# Altium PCB UWB_Control.PcbDoc
Units mil, origin at the board's own origin, x right, y up, seen from the top; angles counter-clockwise.
Board outline 1600 x 2735 mil, 2 copper layers (Top Layer, Bottom Layer); 21 components, 31 nets, 179 pads, 39 vias.
Unrouted connection lines stored in the file: 1.
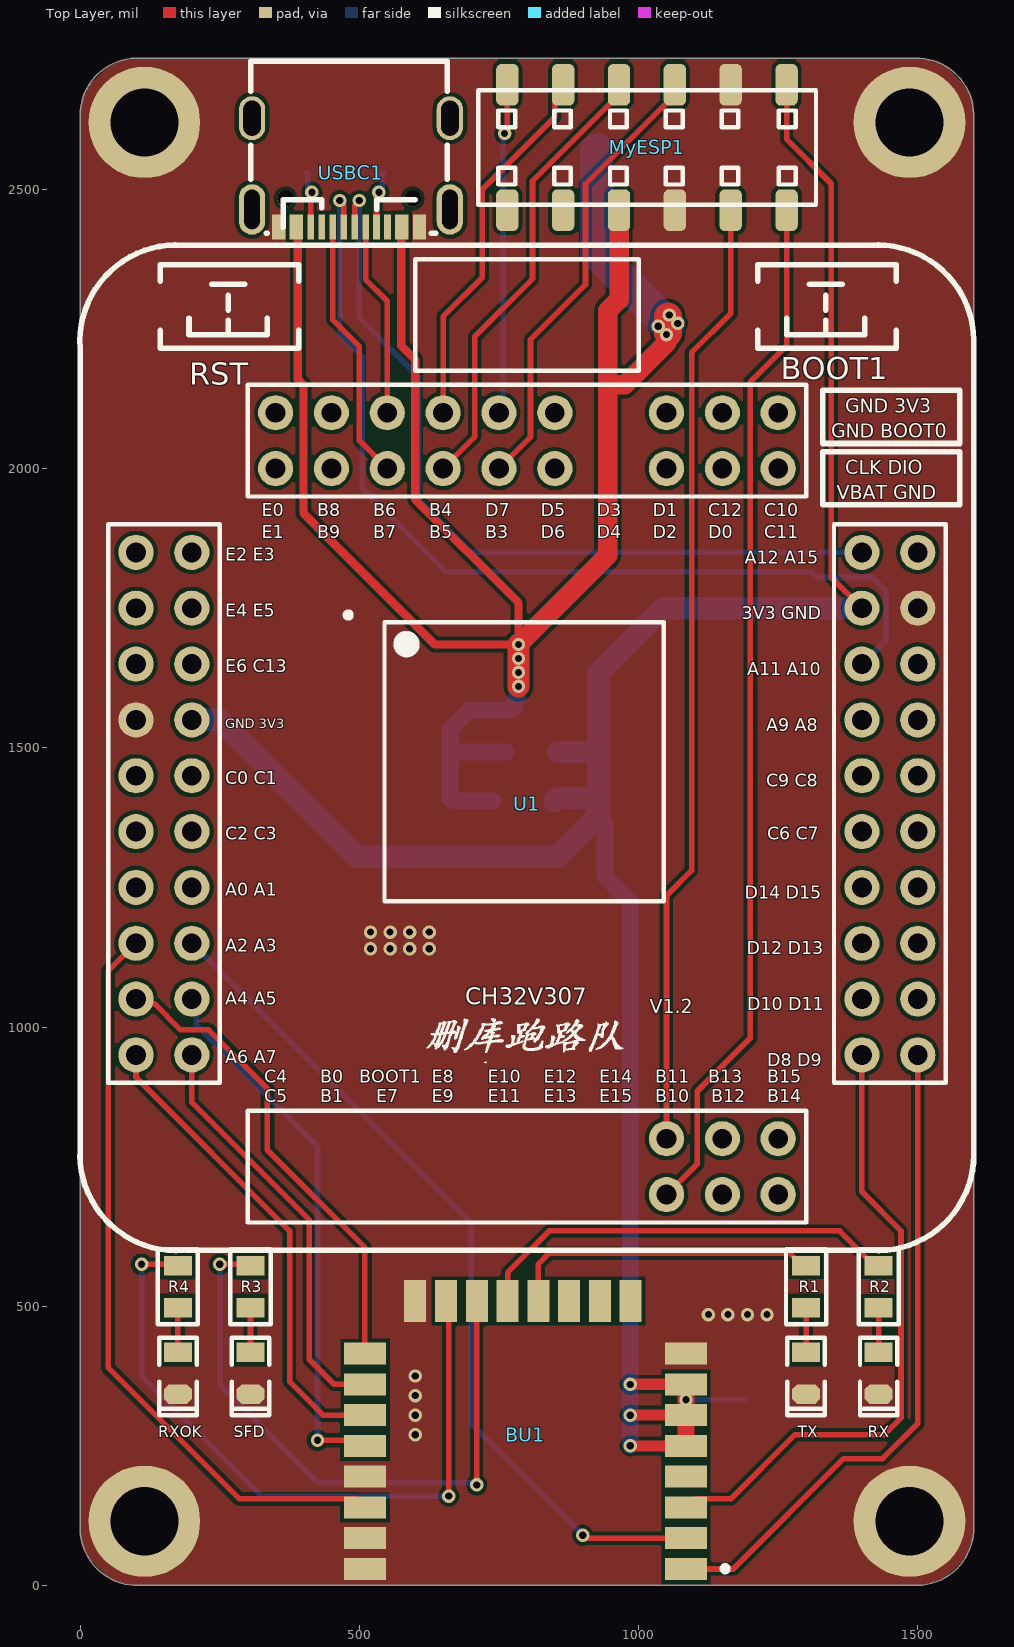
[diagram p0: Top Layer view]
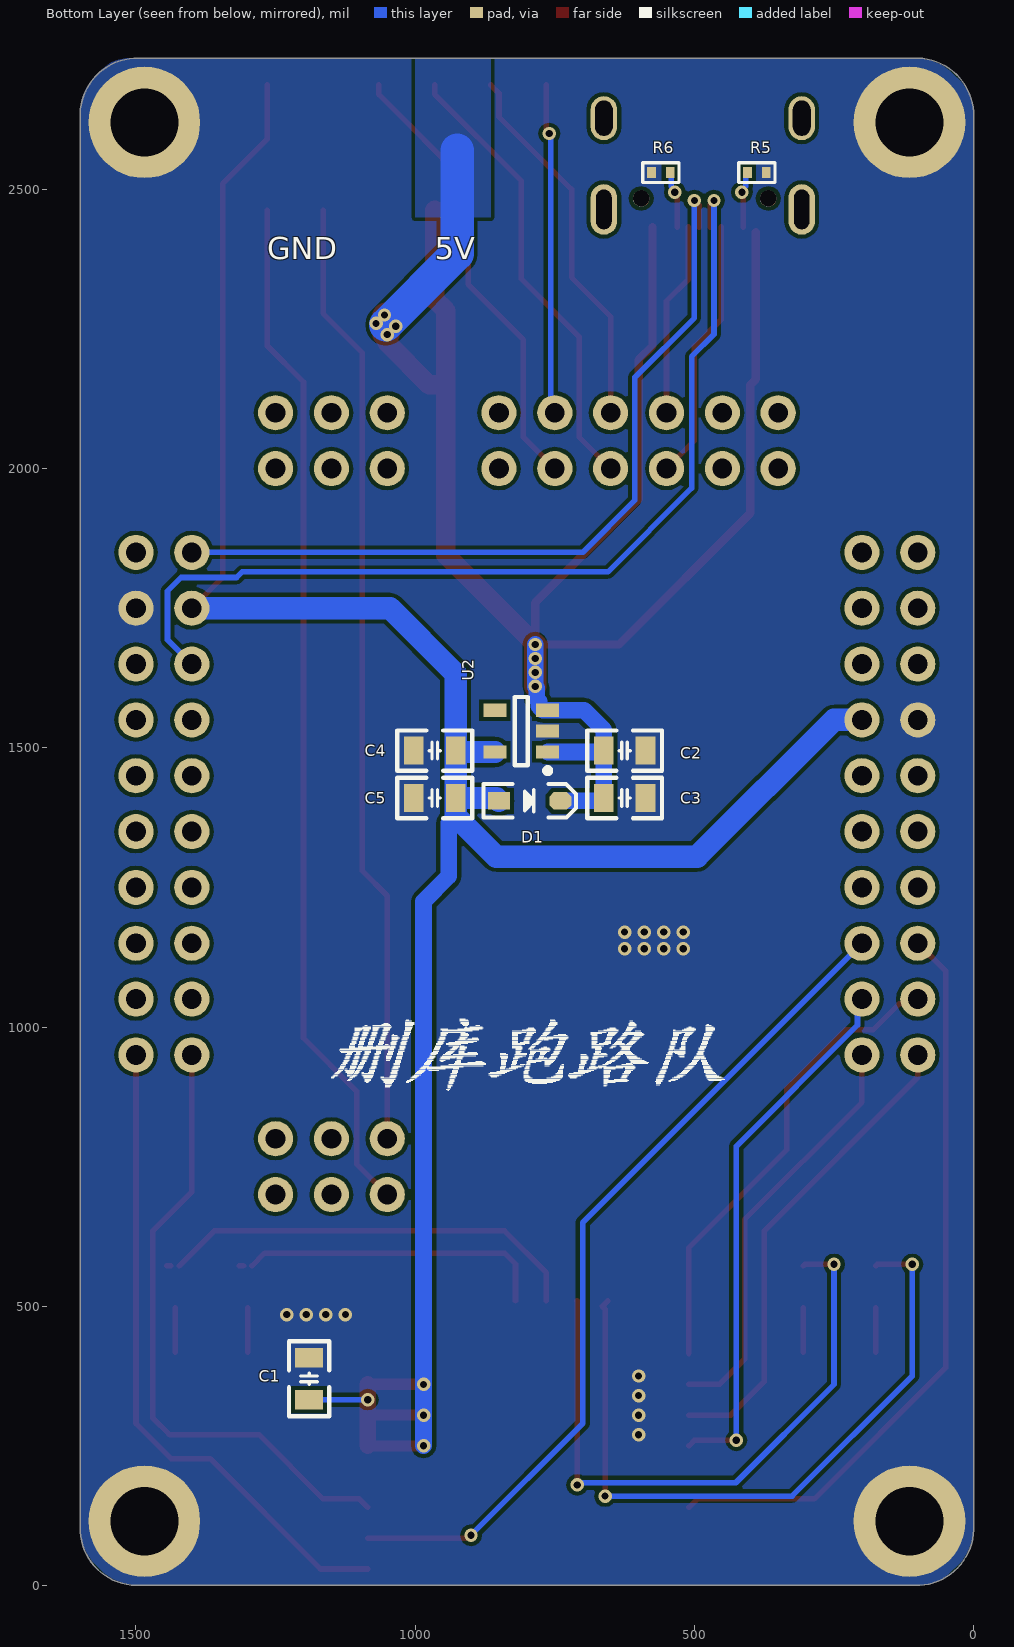
[diagram p1: Bottom Layer view, seen from below]

## Layer stack, top to bottom
Top Solder: solder mask 0.4, Solder Resist, Dk 3.5
Top Layer: signal copper 1.4
Dielectric 1: dielectric 12.6, FR-4, Dk 4.8
Bottom Layer: signal copper 1.4
Bottom Solder: solder mask 0.4, Solder Resist, Dk 3.5

## Board outline
0,100 0,2630 cw(c102.5,2632.5) 100,2735 1495,2735 cw(c1497.5,2632.5) 1600,2635 1600,105 cw(c1497.5,102.5) 1500,0 105,0 cw(c102.5,102.5)

## Design rules (kind name [scope] priority, off if disabled: settings)
Clearance [All] p1: gap=7 ignorepadtopadclearanceinfootprint=FALSE
PolygonConnect PolygonConnect_4 [All vs IsNamedPolygon('Bottom Layer-GND') Or  IsNamedPolygon('Top Layer-GND')] p1: connectstyle=Direct reliefconductorwidth=10 reliefentries=4 polygonreliefangle="90 Angle" airgapwidth=10
PolygonConnect PolygonConnect_3 [All vs IsNamedPolygon('Bottom Layer-5V')] p2: connectstyle=Direct reliefconductorwidth=10 reliefentries=4 polygonreliefangle="90 Angle" airgapwidth=10
PolygonConnect PolygonConnect_2 [All vs IsNamedPolygon('Top Layer-GND')] p3: connectstyle=Direct reliefconductorwidth=10 reliefentries=4 polygonreliefangle="90 Angle" airgapwidth=10
PolygonConnect PolygonConnect_1 [All vs IsNamedPolygon('Bottom Layer-GND') Or  IsNamedPolygon('Top Layer-GND')] p4: connectstyle=Direct reliefconductorwidth=10 reliefentries=4 polygonreliefangle="90 Angle" airgapwidth=10
PolygonConnect [All] p5: connectstyle=Relief reliefconductorwidth=10 reliefentries=4 polygonreliefangle="90 Angle" airgapwidth=10
RoutingVias [All] p1: holewidth=28 width=50 viastyle="Through Hole" minholewidth=28 minwidth=50 maxholewidth=28 maxwidth=50
SolderMaskExpansion [All] p1: expansion=4
Width [All] p1: maxlimit=100 minlimit=10 preferedwidth=10
30 further rules are at their usual default settings.

## Components (designator, comment, footprint, x,y, rotation, side; value= is the part's Value field where it differs from the comment)
BU1 "BU01" "BU01 - duplicate" 915,169.53 r180 top
C1 "0.1uF" C0805_L 1190,370 r270 bottom
C2 "10uF" C0805_L 625,1495 r180 bottom
C3 "100nF" C0805_L 625,1410 r180 bottom
C4 "4.7uF" C0805_L 965,1495 r180 bottom
C5 "100nF" C0805_L 965,1410 r180 bottom
D1 "1N5819" SOD-323 795,1405 r180 bottom
MyESP1 "Header 6X2" HDR2.54-M-LS-2x6P 1015,2575 r180 top
R1 "1K" R0805_L 1300,535 r270 top
R2 "1K" R0805_L 1430,535 r270 top
R3 "1K" R0805_L 305,535 r270 top
R4 "1K" R0805_L 175,535 r270 top
R5 "5.1K" R0402_L 388.27,2530 r180 bottom
R6 "5.1K" R0402_L 560,2530 r180 bottom
RX "红色" LED0805_G 1430,380 r270 top (schematic designator LED2)
RXOK "红色" LED0805_G 175,380 r270 top (schematic designator LED4)
SFD "红色" LED0805_G 305,380 r270 top (schematic designator LED3)
TX "红色" LED0805_G 1300,380 r270 top (schematic designator LED1)
U1 "CH32V307_CoreBoard" CH32V307_PCB 265,2145 r0 top
U2 "" SOT23-5 810,1530 r0 bottom
USBC1 "TYPE-C 2.0 -16P" USB-C-SMD_TYPE-C-USB-5 485,2530 r180 top

## Footprints (in the part's own frame and the unit in brackets; to place one, negate y for a bottom-side part, rotate by r counter-clockwise, add the part's x,y. Pads: shape width x height; smd on the part's side, far side on the other; paste and mask are expansions set on the pad)
"BU01 - duplicate" [mm] "Chip Capacitor, 2-Leads, Body 5.50x2.00mm, IPC Medium Density"
  rect 1.9x1 smd: 1(-4.318,3.556) 2(-4.318,2.156) 3(-4.318,0.756) 4(-4.318,-0.644) 5(-4.318,-2.044) 6(-4.318,-3.444) 7(-4.318,-4.844) 8(-4.318,-6.244) 17(10.287,-6.244) 18(10.287,-4.844) 19(10.287,-3.444) 20(10.287,-2.044) 21(10.287,-0.644) 22(10.287,0.756) 23(10.287,2.156) 24(10.287,3.556)
  rect 1x1.9 smd: 9(-1.799,-8.636) 10(-0.399,-8.636) 11(1.001,-8.636) 12(2.401,-8.636) 13(3.801,-8.636) 14(5.201,-8.636) 15(6.601,-8.636) 16(8.001,-8.636)
C0805_L [mil] "贴片MLCC电容"
  rect 35x50 smd: 1(-37.4,0) 2(37.4,0)
  silkscreen extent -67,-36 67,36, body extent -39,-24 39,24, height 22
CH32V307_PCB [mm]
  round 1.6 hole 0.9: 1(-1.651,-7.493) 2(-4.191,-7.493) 3(-1.651,-10.033) 4(-4.191,-10.033) 5(-1.651,-12.573) 6(-4.191,-12.573) 7(-1.651,-15.113) 8(-4.191,-15.113) 9(-1.651,-17.653) 10(-4.191,-17.653) 11(-1.651,-20.193) 12(-4.191,-20.193) 13(-1.651,-22.733) 14(-4.191,-22.733) 15(-1.651,-25.273) 16(-4.191,-25.273) 17(-1.651,-27.813) 18(-4.191,-27.813) 19(-1.651,-30.353) 20(-4.191,-30.353) 35(19.939,-34.163) 36(19.939,-36.703) 37(22.479,-34.163) 38(22.479,-36.703) 39(25.019,-34.163) 40(25.019,-36.703) 41(28.829,-30.353) 42(31.369,-30.353) 43(28.829,-27.813) 44(31.369,-27.813) 45(28.829,-25.273) 46(31.369,-25.273) 47(28.829,-22.733) 48(31.369,-22.733) 49(28.829,-20.193) 50(31.369,-20.193) 51(28.829,-17.653) 52(31.369,-17.653) 53(28.829,-15.113) 54(31.369,-15.113) 55(28.829,-12.573) 56(31.369,-12.573) 57(28.829,-10.033) 58(31.369,-10.033) 59(28.829,-7.493) 60(31.369,-7.493) 61(25.019,-3.683) 62(25.019,-1.143) 63(22.479,-3.683) 64(22.479,-1.143) 65(19.939,-3.683) 66(19.939,-1.143) 69(14.859,-3.683) 70(14.859,-1.143) 71(12.319,-3.683) 72(12.319,-1.143) 73(9.779,-3.683) 74(9.779,-1.143) 75(7.239,-3.683) 76(7.239,-1.143) 77(4.699,-3.683) 78(4.699,-1.143) 79(2.159,-3.683) 80(2.159,-1.143)
  round 1.6 on Top Overlay: 21(2.159,-34.163) 22(2.159,-36.703) 23(4.699,-34.163) 24(4.699,-36.703) 25(7.239,-34.163) 26(7.239,-36.703) 27(9.779,-34.163) 28(9.779,-36.703) 29(12.319,-34.163) 30(12.319,-36.703) 31(14.859,-34.163) 32(14.859,-36.703) 33(17.399,-34.163) 34(17.399,-36.703) 67(17.399,-3.683) 68(17.399,-1.143)
  silkscreen extent -6.74,-39.25 33.92,6.49
HDR2.54-M-LS-2x6P [mm] "脚距：2.54mm，贴片双排母"
  rrect50% 1.02x1.9 smd: 1(-6.35,2.85) 2(-6.35,-2.85) 3(-3.81,2.85) 4(-3.81,-2.85) 5(-1.27,2.85) 6(-1.27,-2.85) 7(1.27,2.85) 8(1.27,-2.85) 9(3.81,2.85) 10(3.81,-2.85) 11(6.35,2.85) 12(6.35,-2.85)
  silkscreen extent -7.69,-2.6 7.68,2.6, body extent -7.65,-3.2 7.65,3.2, height 5.15
LED0805_G [mil] "绿色0805LED            联系卖家 免费查找封装"
  rect 35x50 smd: 1(-37.4,0)
  oct 35x50 smd: 2(37.4,0)
  silkscreen extent -64,-33 75,33, body extent -39,-25 39,25, height 32
R0402_L [mm] "1/16W贴片电阻"
  rect 0.4x0.5 smd: 1(-0.425,0) 2(0.425,0)
  silkscreen extent -0.82,-0.45 0.83,0.45, body extent -0.5,-0.25 0.5,0.25, height 0.3
R0805_L [mil] "1/8W贴片电阻"
  rect 35x50 smd: 1(-37.4,0) 2(37.4,0)
  silkscreen extent -67,-36 67,36, body extent -39,-25 39,25, height 20
SOD-323 [mm] "1.8x1.3X0.9mm（长宽高，不包括引脚）联系卖家 免费查找封装"
  rect 1x0.8 smd: 1(-1.4,0)
  oct 1x0.8 smd: 2(1.4,0)
  silkscreen extent -2.11,-0.76 2.11,0.76, body extent -1.32,-0.65 1.32,0.65, height 0.95
SOT23-5 [mm] "SOT23, 5-Leads, Body 2.9x1.6mm, Pitch 0.95mm, IPC Medium Density                联系卖家 免费查找封装"
  rect 1.05x0.6 smd: 1(-1.2,0.95) 2(-1.2,0) 3(-1.2,-0.95) 4(1.2,-0.95) 5(1.2,0.95)
  silkscreen extent -1.32,-1.55 0.3,1.92, body extent -1.4,-1.5 1.4,1.5, height 1.15
USB-C-SMD_TYPE-C-USB-5 [mm]
  oval 1.2x2 hole 0.8 slot 1.6 at 90 deg: 0(-4.5,-2.475) 0(4.5,-2.475)
  oval 1.2x2.3 hole 0.7 slot 1.8 at 90 deg: 0(-4.5,1.675) 0(4.5,1.675)
  rect 0.3x1.15 smd: A1(-3.263,2.473) A4(-2.462,2.471) A5(-1.162,2.475) A6(-0.162,2.475) A7(0.337,2.473) A9(2.638,2.475) A12(3.438,2.475) B1(3.138,2.475) B4(2.337,2.475) B5(1.838,2.475) B6(0.838,2.475) B7(-0.663,2.473) B9(-2.162,2.471) B12(-2.963,2.473)
  rect 0.3x1.148 smd: A8(-1.663,2.475) B8(1.337,2.475)
  round 0.75 hole 0.75 unplated: ""(-2.803,1.175) ""(2.978,1.175)
  silkscreen extent -4.38,-5.08 4.56,2.75, body extent -4.34,-5.14 4.6,2.76, height 3.25

## Part data
C1 C2 C3 C4 C5: library part C, "贴片电容/MLCC电容"
D1: library part SS14, "肖特基二极管"
MyESP1: library part "Header  6X2", "6*2P接插件"
R1 R2 R3 R4 R5 R6: library part R, "贴片电阻"
RX RXOK SFD TX: library part LED-SMD, "贴片LED"
U2: library part RT9013-33
USBC1: library part "USB2.0 Type-C 16Pin母座", "USB2.0 Type-C 母座 16Pin", BOM_Manufacturer=LCSC, BOM_Manufacturer Part=-, BOM_Supplier=LCSC, spicePre=U, spiceSymbolName="TYPE-C 3.1 -16P_C168689"

## Free pads (board coordinates)
  round 200 hole 122.05: ""(115,115) ""(115,2620) ""(1485,115) ""(1485,2620)

## Via types
v1: diameter 24, hole 13, Top Layer to Bottom Layer, tented both sides, 39 vias

## Nets (pads, with @x,y where several pads share a name; then routed paths per layer and width w, separated by ;. In a path a pad name is that pad's centre, name@x,y a point inside that pad or via, vN(x,y) a via of type N, cw(c..) or ccw(c..) an arc to the next point about the centre after c; other vN are vias at no path point)
3V3: BU1.5 BU1.6 BU1.7 C1.2 C4.2 C5.2 D1.1 MyESP1.2 U1.7 U1.57 U2.5 | length 4446
  Top Layer w10: v1(985,305) v1@985.12,305.12 ; v1(985,360) v1@985.24,360.24 ; MyESP1.2 1265,2590 1345,2510 1345,1805 U1.57
  Top Layer w20: v1(985,250) BU1.5 ; v1@985.12,305.12 BU1.6 ; v1@985.24,360.24 BU1.7
  Top Layer w30: BU1.5 BU1.6 v1(1085,332.68) BU1.7
  Bottom Layer w10: v1(1085,332.68) 1189.93,332.68 C1.2
  Bottom Layer w30: 927.6,1377.6 940,1365.2 940,1270 985,1225 v1(985,360) v1(985,305) v1(985,250)
  Bottom Layer w40: U1.7 250,1550 495,1305 855,1305 927.6,1377.6 C5.2 ; D1.1 855.11,1410 C5.2 ; U2.5 925.2,1492.6 C4.2 ; U1.57 1045,1750 927.6,1632.6 C4.2 ; C5.2 C4.2
5V: C2.1 C3.1 D1.2 MyESP1.7 U2.1 U2.3 USBC1.A4 USBC1.A9 USBC1.B4 USBC1.B9 | length 3855.8
  Top Layer w10: v1(1050,2240) v1@1052.5,2242.5 ; v1@1052.5,2272.5 v1(1055,2275)
  Top Layer w15: USBC1.B4@390,2423.72 390,2160 400,2150 400,1920 635,1685 v1(785,1685) 785,1760 600,1945 600,2195 575.14,2219.86 USBC1.B9@575.14,2432.72
  Top Layer w35: v1(785,1685) 945,1845 945,2282.74 965,2302.74 MyESP1.7 ; 945,2150 975,2150 1050,2225 v1(1050,2240)
  Top Layer w40: v1(785,1610) v1(785,1635) v1(785,1685)
  Top Layer w50: v1@1052.5,2242.5 v1@1052.5,2272.5
  Bottom Layer w30: D1.2 667.4,1405 C3.1 C2.1 ; U2.1 664.8,1492.6 C2.1 ; v1(785,1685) v1(785,1635) v1(785,1610) 782.32,1607.32 782.32,1586.97 778.43,1583.07 778.43,1574.21 771.61,1567.4 U2.3 697.4,1567.4 662.4,1532.4 C2.1
  Bottom Layer w60: 925,2570 925,2385 1052.5,2257.5
  other v1: 785,1660 1035,2255 1070,2260
B3: MyESP1.6 U1.71 | length 817.7
  Top Layer w10: U1.71 806.5,2056.5 806.5,2231.17 905,2329.67 905,2509.88 1065,2669.88 MyESP1.6
B4: MyESP1.10 U1.74 | length 676.3
  Top Layer w10: U1.74 650,2272.17 720,2342.17 720,2500 849.92,2629.92 849.92,2672.13 MyESP1.10
B5: MyESP1.8 U1.73 | length 817.7
  Top Layer w10: U1.73 706.5,2056.5 706.5,2236.17 810,2339.67 810,2514.88 965,2669.88 MyESP1.8
B10: MyESP1.1 U1.36 | length 1851.9
  Top Layer w10: U1.36 1105,755 1105,885 1200,980 1200,2155 1265,2220 MyESP1.1
B11: MyESP1.3 U1.35 | length 1710.4
  Top Layer w10: U1.35 1050,1235 1095,1280 1095,2207.7 1165,2277.7 MyESP1.3
D7: MyESP1.12 U1.72 | length 600.5
  Top Layer w10: v1@755,2595 v1(760,2600) 765,2605 MyESP1.12
  Bottom Layer w10: U1.72 757.32,2107.32 757.32,2597.32 v1(760,2600)
EXTON: BU1.1 U1.42 | length 1182.9
  Top Layer w10: BU1.1 1169.53,29.53 1367,227 1437,227 1500,290 U1.42
GND: BU1.8 BU1.16 BU1.21 BU1.23 BU1.24 C1.1 C2.2 C3.2 C4.1 C5.1 MyESP1.4 MyESP1.5 pad. R5.2 R6.1 RX.2 RXOK.2 SFD.2 TX.2 U1.8 U1.58 U2.2 USBC1.A1 USBC1.A12 USBC1.B1 USBC1.B12
  other v1: 600,270 600,305 600,340 600,375 1125,485 1160,485 1195,485 1230,485 520,1140 555,1140 590,1140 625,1140 520,1170 555,1170 590,1170 625,1170
LED_RX: BU1.13 R2.1 | length 772.3
  Top Layer w10: BU1.13 765.35,560.35 840,635 1359.9,635 R2.1@1422.5,572.4 ; R2.1@1437.5,572.4 R2.1@1445,572.4
LED_RXOK: BU1.15 R4.1 | length 1495.8
  Top Layer w10: v1(110,575) 172.4,575 R4.1 ; BU1.15 665,499.65 660,494.65 v1(660,160) 660,395
  Bottom Layer w10: v1(110,575) 110,375 325,160 v1(660,160)
LED_SFD: BU1.14 R3.1 | length 1135.3
  Top Layer w10: v1(250,575) 302.4,575 R3.1 ; v1(710,180) 710,509.29 BU1.14
  Bottom Layer w10: v1(250,575) 250,360 426,184 706,184 v1(710,180)
LED_TX: BU1.12 R1.1 | length 562.9
  Top Layer w10: BU1.12 820.47,575.47 840,595 1269.9,595 R1.1@1292.5,572.4 ; R1.1@1307.5,572.4 R1.1@1315,572.4
NetLED1_1: R1.2 TX.1 | length 80.2
  Top Layer w10: TX.1 R1.2
NetLED2_1: R2.2 RX.1 | length 80.2
  Top Layer w10: RX.1 R2.2
NetLED3_1: R3.2 SFD.1 | length 80.2
  Top Layer w10: SFD.1 R3.2
NetLED4_1: R4.2 RXOK.1 | length 80.2
  Top Layer w10: RXOK.1 R4.2
NetR5_1: R5.1 USBC1.B5 | length 102.6
  Top Layer w10: USBC1.B5 412.66,2492.65 v1(415,2495)
  Bottom Layer w10: R5.1 407.87,2527.13 407.87,2505.91 415,2498.79 v1(415,2495)
NetR6_2: R6.2 USBC1.A5 | length 102.6
  Top Layer w10: USBC1.A5 530.76,2490.77 v1(535,2495)
  Bottom Layer w10: v1(535,2495) 535,2498.79 541.37,2505.16 541.37,2528.1 R6.2
PA11: U1.55 USBC1.A7 | length 1745.3
  Top Layer w10: v1(465,2480) 471.72,2473.28 USBC1.A7
  Bottom Layer w10: v1(465,2480) 465,2240.61 505,2200.61 505,1965 655,1815 1310,1815 1320,1805 1419.14,1805 1443.5,1780.65 1443.5,1693.5 U1.55
PA12: U1.59 USBC1.A6 | length 1463.8
  Top Layer w10: USBC1.A6 491.39,2471.4 v1(500,2480)
  Bottom Layer w10: v1(500,2480) 500,2270 606.5,2163.5 606.5,1943.5 700,1850 U1.59
PB6: U1.76 USBC1.B7 | length 348.7
  Top Layer w10: USBC1.B7 511.09,2338.91 550,2300 U1.76
PB7: U1.75 USBC1.B6 | length 473.1
  Top Layer w10: USBC1.B6 452.02,2266.9 500,2218.93 500,2050 U1.75
RSTN: BU1.3 U1.41 | length 1130.4
  Top Layer w10: BU1.3 1100.24,155 1165,155 1280,270 1440,270 1470,300 1470,635 1400,705 U1.41
SPI_CS: BU1.17 U1.18 | length 848.4
  Top Layer w10: U1.18 108.01,1041.99 133.01,1041.99 180,995 230,995 335,890 335,780 510,605 BU1.17
SPI_IRQ: BU1.22 U1.16 | length 1344.4
  Top Layer w10: U1.16 50,1100 50,390 285,155 494.76,155 BU1.22
SPI_MISO: BU1.19 U1.20 | length 858.7
  Top Layer w10: U1.20 100,910 375,635 375,365 434.88,305.12 BU1.19
SPI_MOSI: BU1.18 U1.19 | length 750.5
  Top Layer w10: U1.19 200,865 410,655 410,405 454.76,360.24 BU1.18
SPI_SCK: BU1.20 U1.17 | length 972.3
  Top Layer w10: v1(425,260) 500,260 BU1.20
  Bottom Layer w10: U1.17 208.01,1041.99 208.01,1003.5 425,786.51 v1(425,260)
WAKEUP: BU1.2 U1.15 | length 1537.2
  Top Layer w10: v1(900,90) 903.79,90 909.14,84.65 BU1.2
  Bottom Layer w10: U1.15 700,650 700,290 v1(900,90)
pads on no net: BU1.4 BU1.9 BU1.10 BU1.11 MyESP1.9 MyESP1.11 U1.1 U1.2 U1.3 U1.4 U1.5 U1.6 U1.9 U1.10 U1.11 U1.12 U1.13 U1.14 U1.21 U1.22 U1.23 U1.24 U1.25 U1.26 U1.27 U1.28 U1.29 U1.30 U1.31 U1.32 U1.33 U1.34 U1.37 U1.38 U1.39 U1.40 U1.43 U1.44 U1.45 U1.46 U1.47 U1.48 U1.49 U1.50 U1.51 U1.52 U1.53 U1.54 U1.56 U1.60 U1.61 U1.62 U1.63 U1.64 U1.65 U1.66 U1.67 U1.68 U1.69 U1.70 U1.77 U1.78 U1.79 U1.80 U2.4 USBC1. USBC1.0 USBC1.A8 USBC1.B8

## Polygon pours and split planes (outlines as drawn)
GND on Bottom Layer "Bottom Layer-GND" (solid, pour order 18): 0,106.42 ccw(c100,106.42) 29.29,35.71 40,25 ccw(c100.36,85.36) 100.36,0 1493.58,0 ccw(c1493.58,100) 1564.29,29.29 1570.71,35.71 ccw(c1500,106.42) 1600,106.42 1600,2633.58 ccw(c1500,2633.58) 1570.71,2704.29 1560,2715 ccw(c1511.72,2666.72) 1511.72,2735 106.42,2735 ccw(c106.42,2635) 35.71,2705.71 25,2695 ccw(c85.36,2634.64) 0,2634.64
5V on Bottom Layer "Bottom Layer-5V" (solid, pour order 14): 865,2735 865,2450 1000,2450 1000,2735
GND on Top Layer "Top Layer-GND" (solid, pour order 16): 0,2635 0,100 ccw(c84.5,100) 24.75,40.25 40,25 ccw(c100.36,85.36) 100.36,0 1493.58,0 ccw(c1493.58,100) 1564.29,29.29 1570.71,35.71 ccw(c1500,106.42) 1600,106.42 1600,2628.58 ccw(c1500,2628.58) 1570.71,2699.29 1555,2715 ccw(c1506.72,2666.72) 1506.72,2735 106.42,2735 ccw(c106.42,2635) 35.71,2705.71 24.75,2694.75 ccw(c84.5,2635)

## Silkscreen, mask and mechanical layers (free items; w line width, h text height)
Top Overlay:
  circle w10: c1155,30 r5
Bottom Overlay:
  drawing of 894 lines, arcs and shapes, not listed
  text "5V" at 965,2375 h40
  text "GND" at 1265,2375 h40
Bottom Solder:
  rectangle: 1145,2450 1280,2735
  rectangle: 865,2450 1000,2735
Mechanical 1:
  the board outline again, w10

## Text inside footprints (layer, text, board x,y; h text height)
U1: Top Overlay "CLK DIO" at 1370,1990 h25; Top Overlay "VBAT GND" at 1355,1945 h25; Top Overlay "GND BOOT0" at 1345,2055 h25; Top Overlay "GND 3V3" at 1370,2100 h25; Top Overlay "BOOT1" at 1255,2160 h40; Top Overlay "RST" at 195,2150 h40; Top Overlay "A4 A5" at 260,1040 h23; Top Overlay "A12 A15" at 1190,1830 h23; Top Overlay "V1.2" at 1020,1025 h25; Top Overlay "C4" at 330,900 h23; Top Overlay "B0" at 430,900 h23; Top Overlay "BOOT1" at 500,900 h23; Top Overlay "E8" at 630,900 h23; Top Overlay "E10" at 730,900 h23; Top Overlay "E12" at 830,900 h23; Top Overlay "E14" at 930,900 h23; Top Overlay "B11" at 1030,900 h23; Top Overlay "B13" at 1125,900 h23; Top Overlay "B15" at 1230,900 h23; Top Overlay "C5" at 330,865 h23; Top Overlay "B1" at 430,865 h23; Top Overlay "E7" at 530,865 h23; Top Overlay "E9" at 630,865 h23; Top Overlay "E11" at 730,865 h23; Top Overlay "E13" at 830,865 h23; Top Overlay "E15" at 930,865 h23; Top Overlay "B10" at 1030,865 h23; Top Overlay "B12" at 1130,865 h23; Top Overlay "B14" at 1230,865 h23; Top Overlay "E1" at 325,1875 h23; Top Overlay "B9" at 425,1875 h23; Top Overlay "B7" at 525,1875 h23; Top Overlay "B5" at 625,1875 h23; Top Overlay "B3" at 725,1875 h23; Top Overlay "D6" at 825,1875 h23; Top Overlay "D4" at 925,1875 h23; Top Overlay "D2" at 1025,1875 h23; Top Overlay "D0" at 1125,1875 h23; Top Overlay "C11" at 1225,1875 h23; Top Overlay "C10" at 1225,1915 h23; Top Overlay "C12" at 1125,1915 h23; Top Overlay "D1" at 1025,1915 h23; Top Overlay "D3" at 925,1915 h23; Top Overlay "D5" at 825,1915 h23; Top Overlay "D7" at 725,1915 h23; Top Overlay "B4" at 625,1915 h23; Top Overlay "B6" at 525,1915 h23; Top Overlay "B8" at 425,1915 h23; Top Overlay "E0" at 325,1915 h23; Top Overlay "3V3 GND" at 1185,1730 h23; Top Overlay "A11 A10" at 1195,1630 h23; Top Overlay "A9 A8" at 1228.32,1530 h23; Top Overlay "C9 C8" at 1228.32,1430 h23; Top Overlay "C6 C7" at 1230,1335 h23; Top Overlay "D14 D15" at 1190,1230 h23; Top Overlay "D12 D13" at 1193.83,1130 h23; Top Overlay "D10 D11" at 1195,1030 h23; Top Overlay "D8 D9" at 1230,930 h23; Top Overlay "A6 A7" at 260,935 h23; Top Overlay "A2 A3" at 260,1135 h23; Top Overlay "A0 A1" at 260,1235 h23; Top Overlay "C2 C3" at 260,1335 h23; Top Overlay "C0 C1" at 260,1435 h23; Top Overlay "GND 3V3" at 260,1535 h17; Top Overlay "E6 C13" at 260,1635 h23; Top Overlay "E4 E5" at 260,1735 h23; Top Overlay "E2 E3" at 260,1835 h23; Top Overlay "CH32V307" at 690,1040 h30